# EAGLE board Amplificador_Push_Pull_AB (EAGLE 7.6.0)
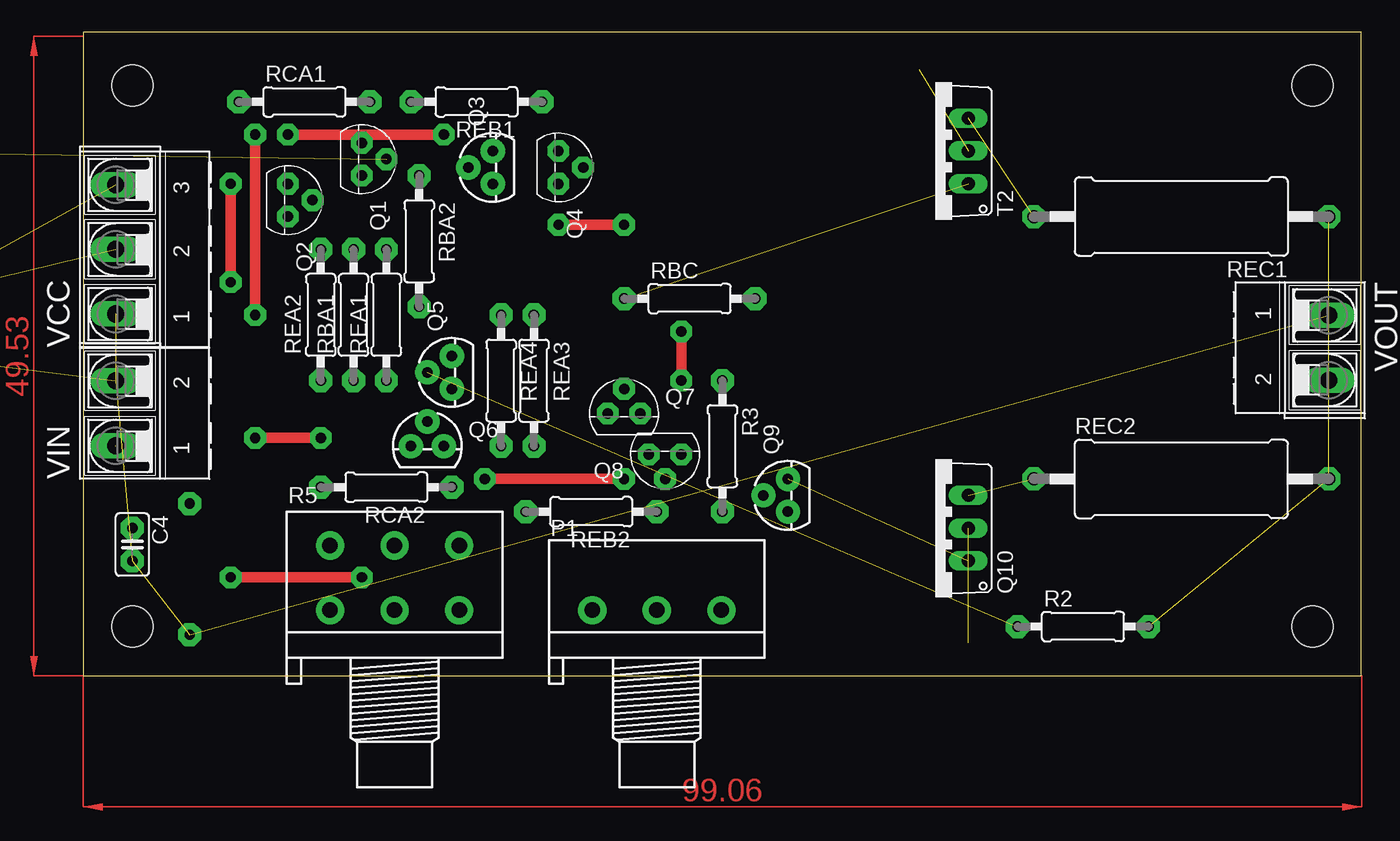
[diagram p0: board, top side]
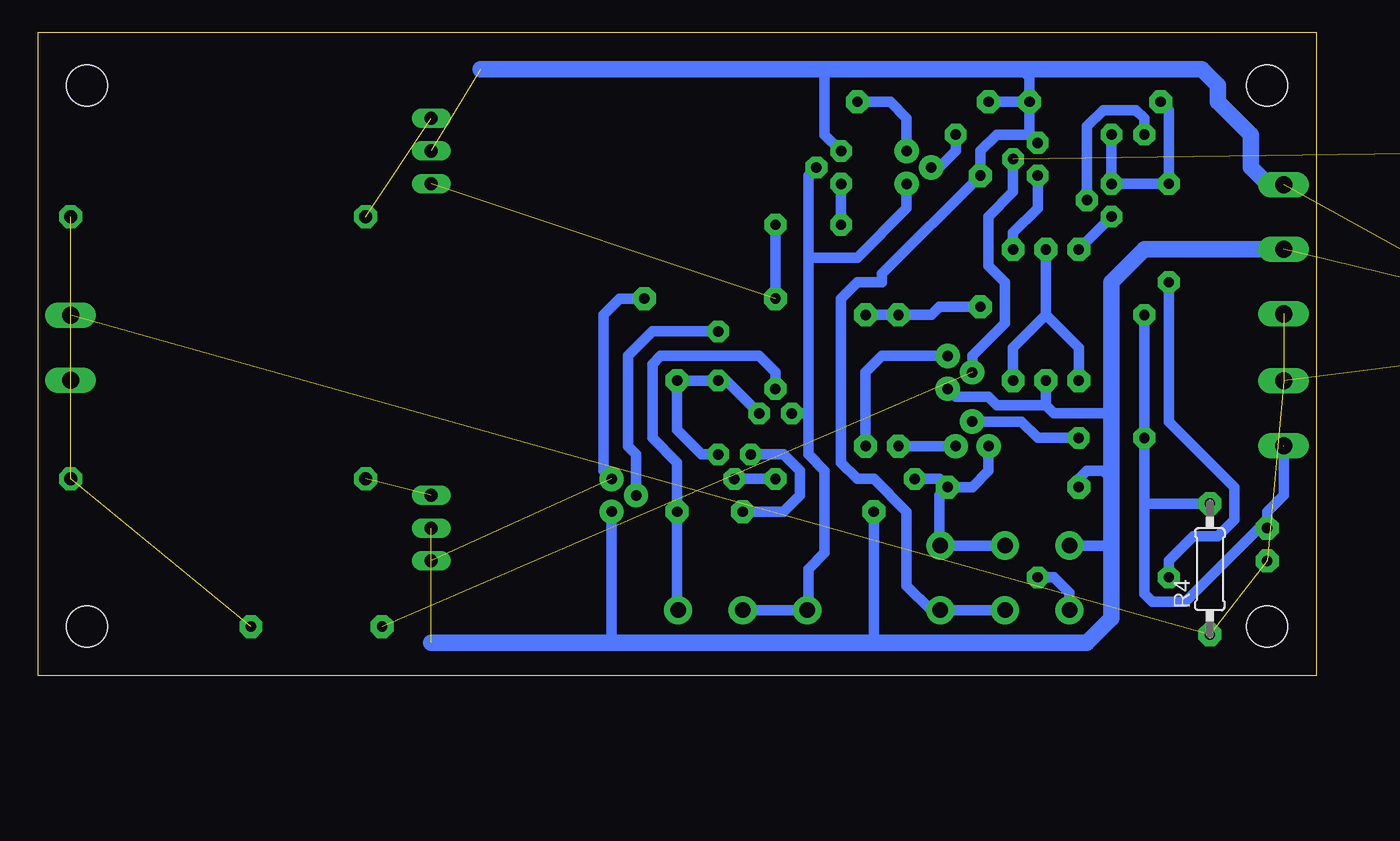
[diagram p1: board, bottom side, seen from below]

Size 99.04 x 49.84 mm. Coordinates in mm from the lower left corner, seen from the top.
Outline: 0,0 99.04,0 99.04,49.84 0,49.84 0,0
Copper layers (1*16): Top 0.035mm / dielectric 1.5mm / Bottom 0.035mm
Design rules "default": minimum track width 10mil, minimum drill 24mil, track to track 8mil, track to pad 8mil, pad to pad 8mil, via to via 8mil, smd to smd 8mil, copper to edge 40mil, drill to drill 8mil, minimum pad ring 10mil, minimum via ring 8mil, stop-mask expansion 4mil, vias tented up to drill 0mil, thermal gap 10mil
Holes 3.2 mm at 3.81,3.81 3.81,45.72 95.25,45.72 95.25,3.81

## Footprints (pad centres in the part's own frame; a part is rotated, then mirrored left to right if it is on the bottom)
E2,5-6 = drill 0.813 pad 1.6: + -1.27,0 | drill 0.813 pad 1.6 octagon: - 1.27,0
E2,5-5 = drill 0.813 pad 1.6: + -1.27,0 | drill 0.813 pad 1.6 octagon: - 1.27,0
C025-025X050 = drill 0.8 pad 1.778 octagon: 1 -1.27,0; 2 1.27,0
3RP/1610N = drill 1.2 pad 2.184: 1 -5,0; 2 0,0; 3 5,0
TO92 = drill 0.813 pad 1.676 octagon: 1 1.27,0; 2 0,1.905; 3 -1.27,0
TO-92 = drill 0.813 pad 1.88: 1 -1.27,0; 2 0,1.905; 3 1.27,0
TO220AV = drill 1.016 long: B -2.54,-2.54; C 0,-2.54; E 2.54,-2.54
0207/10 = drill 0.8 pad 1.778 octagon: 1 -5.08,0; 2 5.08,0
3RP/1610G = drill 1.2 pad 2.184: 1-1 -5,0; 1-2 0,0; 1-3 5,0; 2-1 -5,5; 2-2 0,5; 2-3 5,5
0617/22 = drill 1 pad 1.778 octagon: 1 -11.43,0; 2 11.43,0
TO220AV' = drill 1.016 long: 1 -2.54,-2.54; 2 0,-2.54; 3 2.54,-2.54
AK500/3-H = drill 1.321 long: 1 -5.004,0; 2 0,0; 3 5.004,0
AK500/2-H = drill 1.321 long: 1 -2.515,0; 2 2.515,0

## Placement (x,y rotation side)
C1  100uF  [E2,5-6]  -19.05,25.4 0 top  (outside the outline)
C2  100uF  [E2,5-6]  -27.94,25.4 0 top  (outside the outline)
C3  10uF  [E2,5-5]  -36.83,24.13 0 top  (outside the outline)
C4  220nF  [C025-025X050]  3.81,10.16 270 top
P1  100k  [3RP/1610N]  44.45,5.08 0 top
Q1  BC547  [TO92]  21.59,40.01 270 top
Q2  BC547  [TO92]  15.88,36.83 270 top
Q3  [TO-92]  31.75,39.37 90 top
Q4  BC547  [TO92]  36.83,39.37 270 top
Q5  [TO-92]  28.57,23.5 90 top
Q6  [TO-92]  26.67,17.78 0 top
Q7  BC547  [TO92]  41.91,20.32 0 top
Q8  BC547  [TO92]  45.09,17.14 180 top
Q9  [TO-92]  54.61,13.97 90 top
Q10  TIP42C  [TO220AV]  66.04,11.43 90 top
R1  2k2  [0207/10]  -19.05,40.64 0 top  (outside the outline)
R2  47k  [0207/10]  77.47,3.81 0 top
R3  [0207/10]  49.53,17.78 270 top
R4  47k  [0207/10]  8.26,8.26 90 bottom
R5  [3RP/1610G]  24.13,5.08 0 top
RBA1  8k2  [0207/10]  20.95,27.94 90 top
RBA2  8k2  [0207/10]  26.04,33.66 270 top
RBC  3k6  [0207/10]  46.99,29.21 0 top
RCA1  2k4  [0207/10]  17.14,44.45 0 top
RCA2  2k4  [0207/10]  23.5,14.61 180 top
REA1  82  [0207/10]  23.5,27.94 90 top
REA2  82  [0207/10]  18.41,27.94 90 top
REA3  82  [0207/10]  34.92,22.86 270 top
REA4  82  [0207/10]  32.38,22.86 270 top
REB1  1k8  [0207/10]  30.48,44.45 180 top
REB2  1k8  [0207/10]  39.37,12.7 180 top
REC1  0.22  [0617/22]  85.09,35.56 180 top
REC2  0.22  [0617/22]  85.09,15.24 0 top
T2  2SC1307  [TO220AV']  66.04,40.64 90 top
VCC  [AK500/3-H]  2.54,33.02 90 top
VIN  [AK500/2-H]  2.54,20.32 90 top
VOUT  [AK500/2-H]  96.52,25.4 270 top

## Library data of the parts
C1-C4 R1-R4 RBA1 RBA2 RBC RCA1 RCA2 REA1-REA4 REB1 REB2 REC1 REC2 = rcl
P1 R5 = pot
Q1 Q2 Q4 Q7 Q8 = transistor
Q3 Q5 Q6 Q9 = SparkFun-DiscreteSemi
Q10 = transistor-power
T2 = transistor-neu-to92
VCC VIN VOUT = con-ptr500; OC_FARNELL: unknown; OC_NEWARK: unknown

## Nets
+18V: C1.+ Q1.3 Q4.3 R5.1-2 R5.1-3 RBA2.1 RCA1.2 REB1.2 T2.2 VCC.3
-18V: C2.+ Q5.1 Q9.1 Q10.C R5.2-1 RBA1.1 RCA2.2 REB2.2 VCC.2
FB: Q1.2 Q5.2 R1.1 R2.1
GND: C1.- C2.- C3.- C4.2 R4.1 VCC.1 VIN.2 VOUT.1
N$1: Q1.1 REA1.2
N$2: RBA1.2 REA1.1 REA2.1
N$3: RBA2.2 REA3.1 REA4.1
N$4: Q2.1 REA2.2
N$5: Q2.3 Q3.2 R5.1-1 RCA1.1
N$6: Q6.3 REA4.2
N$7: Q5.3 REA3.2
N$8: Q6.1 Q8.2 R5.2-2 R5.2-3 RCA2.1
N$10: Q3.3 REB1.1
N$11: P1.1 P1.2 Q3.1 Q4.2 Q7.3
N$13: Q4.1 RBC.1 T2.1
N$15: Q7.1 Q8.3 Q9.2 R3.1
N$16: Q8.1 REB2.1
N$17: Q9.3 Q10.B RBC.2
N$19: REC1.2 T2.3
N$21: Q10.E REC2.1
N$23: C3.+ R1.2
P1: P1.3 Q7.2 R3.2
VIN: C4.1 Q2.2 Q6.2 R4.2 VIN.1
VOUT: R2.2 REC1.1 REC2.2 VOUT.2

## Tracks (layer width: path | path; a pad name or v marks a point on that pad's centre or on a via)
+18V  (2 unrouted)
  Bottom 0.813: Q1.3 22.23,41.91 | 22.23,41.91 RCA1.2 | 22.23,41.91 24.77,41.91 26.04,40.64 RBA2.1 33.66,31.11 33.66,30.48 35.56,30.48 36.83,29.21 36.83,16.51 35.56,15.24 34.29,15.24 31.75,12.7 31.75,6.99 29.84,5.08 R5.1-2 R5.1-3 | RCA1.2 22.23,46.35 22.86,46.99 | REB1.2 RCA1.2 | Q4.3 38.1,41.91 38.1,46.99
  Bottom 1.27: VCC.3 3.73,38.02 5.08,39.37 5.08,41.91 7.62,44.45 7.62,45.72 8.89,46.99 22.86,46.99 38.1,46.99 64.77,46.99
-18V  (2 unrouted)
  Bottom 0.813: 15.88,20.32 20.32,20.32 20.95,20.95 | RCA2.2 18.41,15.24 17.78,15.88 16.51,15.88 15.88,15.24 | Q5.1 27.94,21.59 25.4,21.59 24.77,20.95 20.95,20.95 | RBA1.1 20.95,20.95 | R5.2-1 15.96,10.08 15.88,10.16 | REB2.2 34.29,2.54 | Q9.1 54.61,2.54
  Bottom 1.27: VCC.2 13.34,33.02 15.88,30.48 15.88,20.32 15.88,15.24 15.88,10.16 15.88,4.45 17.78,2.54 34.29,2.54 54.61,2.54 68.58,2.54
FB  (2 unrouted)
  Bottom 0.813: Q5.2 26.67,24.77 24.13,27.3 24.13,30.48 25.4,31.75 25.4,35.56 23.5,37.47 Q1.2
GND  (7 unrouted)
N$1
  Bottom 0.813: REA1.2 23.5,34.29 21.59,36.2 Q1.1
N$2
  Bottom 0.813: REA2.1 18.41,25.4 20.95,27.94 | 20.95,27.94 RBA1.2 | REA1.1 23.5,25.4 20.95,27.94
N$3
  Bottom 0.813: RBA2.2 29.21,28.57 29.84,27.94 REA4.1 REA3.1
N$4
  Bottom 0.813: REA2.2 Q2.1
N$5  (via drill 0.8 pad 1.68)
  Top 0.813: v15.88,41.91 v27.94,41.91 | v11.43,38.1 v11.43,30.48 | v11.43,7.62 v21.59,7.62
  Bottom 0.813: v15.88,41.91 Q2.3 v11.43,38.1 11.43,43.81 RCA1.1 | v11.43,30.48 11.43,19.68 6.35,14.61 6.35,12.06 7.62,10.79 9.53,10.79 11.43,8.89 v11.43,7.62 | R5.1-1 19.13,6.43 20.32,7.62 v21.59,7.62 | Q3.2 29.21,39.37 27.94,40.64 v27.94,41.91
N$6
  Bottom 0.813: Q6.3 REA4.2
N$7
  Bottom 0.813: REA3.2 34.92,23.5 33.66,24.77 Q5.3
N$8  (via drill 0.8 pad 1.68)
  Top 0.813: v31.11,15.24 v41.91,15.24
  Bottom 0.813: Q6.1 25.4,15.88 26.67,14.61 RCA2.1 | R5.2-2 R5.2-3 29.21,10.16 29.21,13.97 RCA2.1 | RCA2.1 29.21,15.24 v31.11,15.24 | Q8.2 v41.91,15.24
N$10
  Bottom 0.813: Q3.3 31.75,43.18 33.02,44.45 REB1.1
N$11
  Bottom 0.813: P1.1 P1.2 39.37,5.08 39.37,8.26 38.1,9.53 38.1,15.88 39.37,17.14 39.37,20.32 | Q7.3 39.37,20.32 | Q3.1 31.75,36.2 35.56,32.38 39.37,32.38 | Q4.2 39.37,38.73 39.37,32.38 | 39.37,32.38 39.37,20.32
N$13  (via drill 0.8 pad 1.68)  (1 unrouted)
  Top 0.813: v36.83,34.92 v41.91,34.92
  Bottom 0.813: Q4.1 v36.83,34.92 | v41.91,34.92 RBC.1
N$15  (via drill 0.8 pad 1.68)
  Top 0.813: v46.35,26.67 v46.35,22.86
  Bottom 0.813: Q8.3 47.62,17.14 49.53,19.05 R3.1 47.62,22.86 v46.35,22.86 45.72,22.86 Q7.1 | Q9.2 52.7,17.14 53.34,17.78 53.34,24.77 51.44,26.67 v46.35,26.67
N$16
  Bottom 0.813: REB2.1 41.27,12.7 40.01,13.97 40.01,15.88 41.27,17.14 Q8.1
N$17  (1 unrouted)
  Bottom 0.813: Q9.3 55.24,15.88 55.24,27.94 53.98,29.21 RBC.2
N$19  (1 unrouted)
N$21  (1 unrouted)
N$23  (1 unrouted)
P1
  Bottom 0.813: P1.3 49.53,5.16 R3.2 49.53,16.51 51.44,18.41 51.44,24.13 50.8,24.77 43.18,24.77 41.91,23.5 Q7.2
VIN  (via drill 0.8 pad 1.68)  (1 unrouted)
  Top 0.813: v18.41,18.41 v13.34,18.41 | v13.34,41.91 v13.34,27.94
  Bottom 0.813: v13.34,27.94 v13.34,18.41 13.34,13.34 | Q2.2 17.78,42.55 16.51,43.81 13.97,43.81 13.34,43.18 v13.34,41.91 | v18.41,18.41 21.59,18.41 22.86,19.68 Q6.2 | 10.16,13.34 R4.2 13.34,13.34 | 2.54,17.78 2.54,13.97 3.81,12.7 C4.1 4.45,11.43 10.16,5.71 12.7,5.71 13.34,6.35 13.34,13.34
VOUT  (3 unrouted)
(copper drawn outside any net)
  shapes: Top area x2